# EAGLE board candle8x11n (EAGLE 6.6.0), part 1 of 4
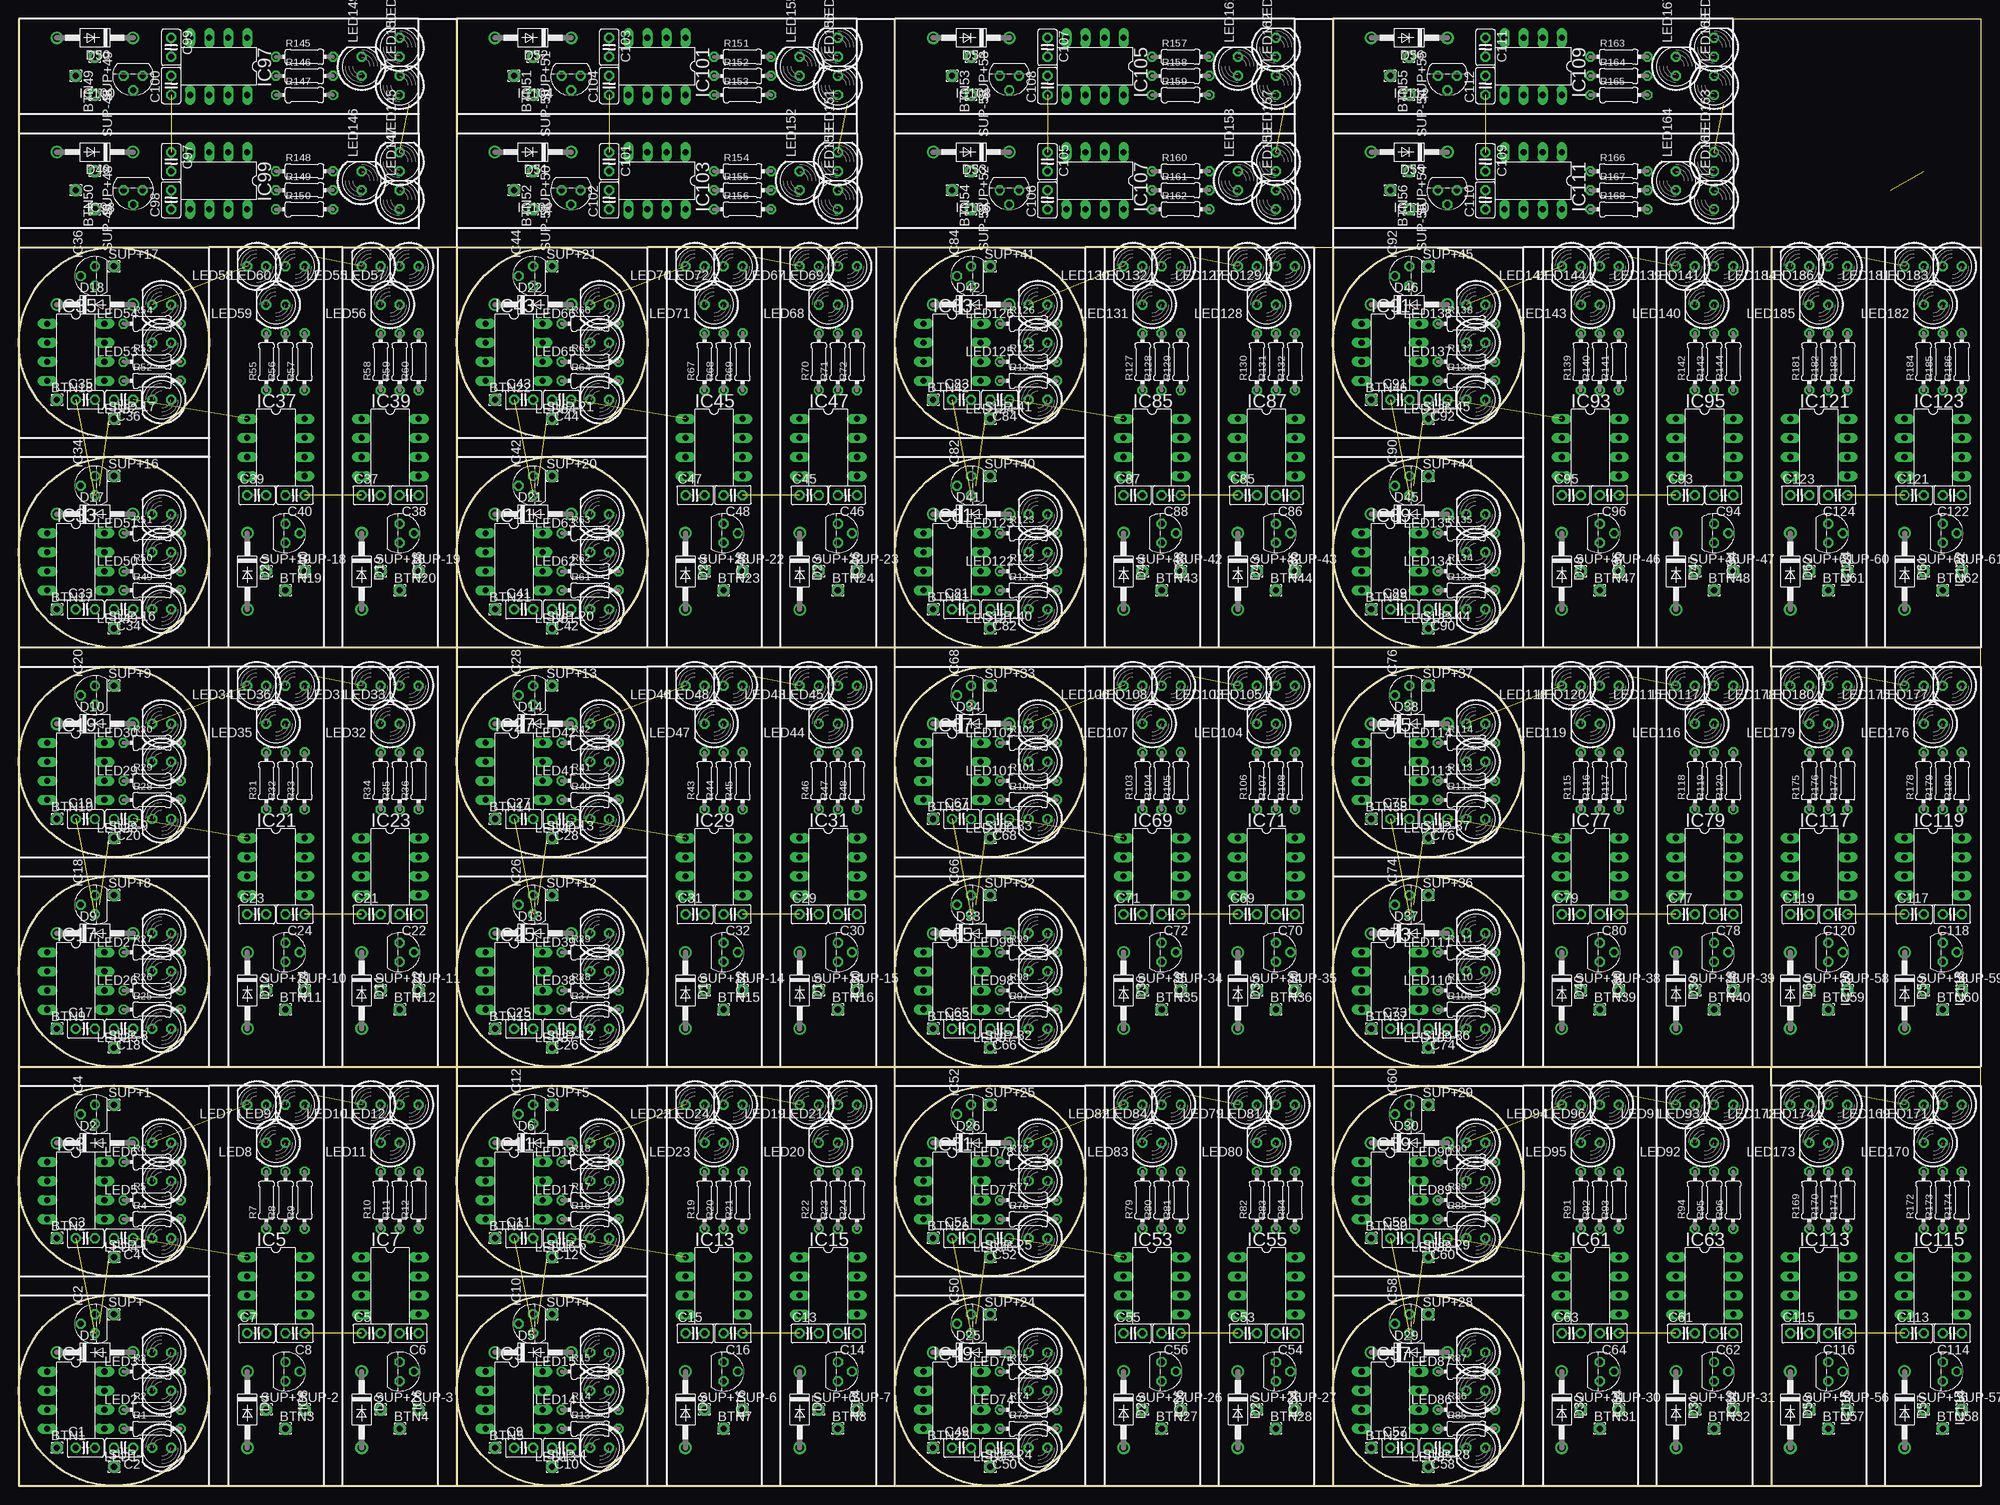
[diagram p0: board, top side]
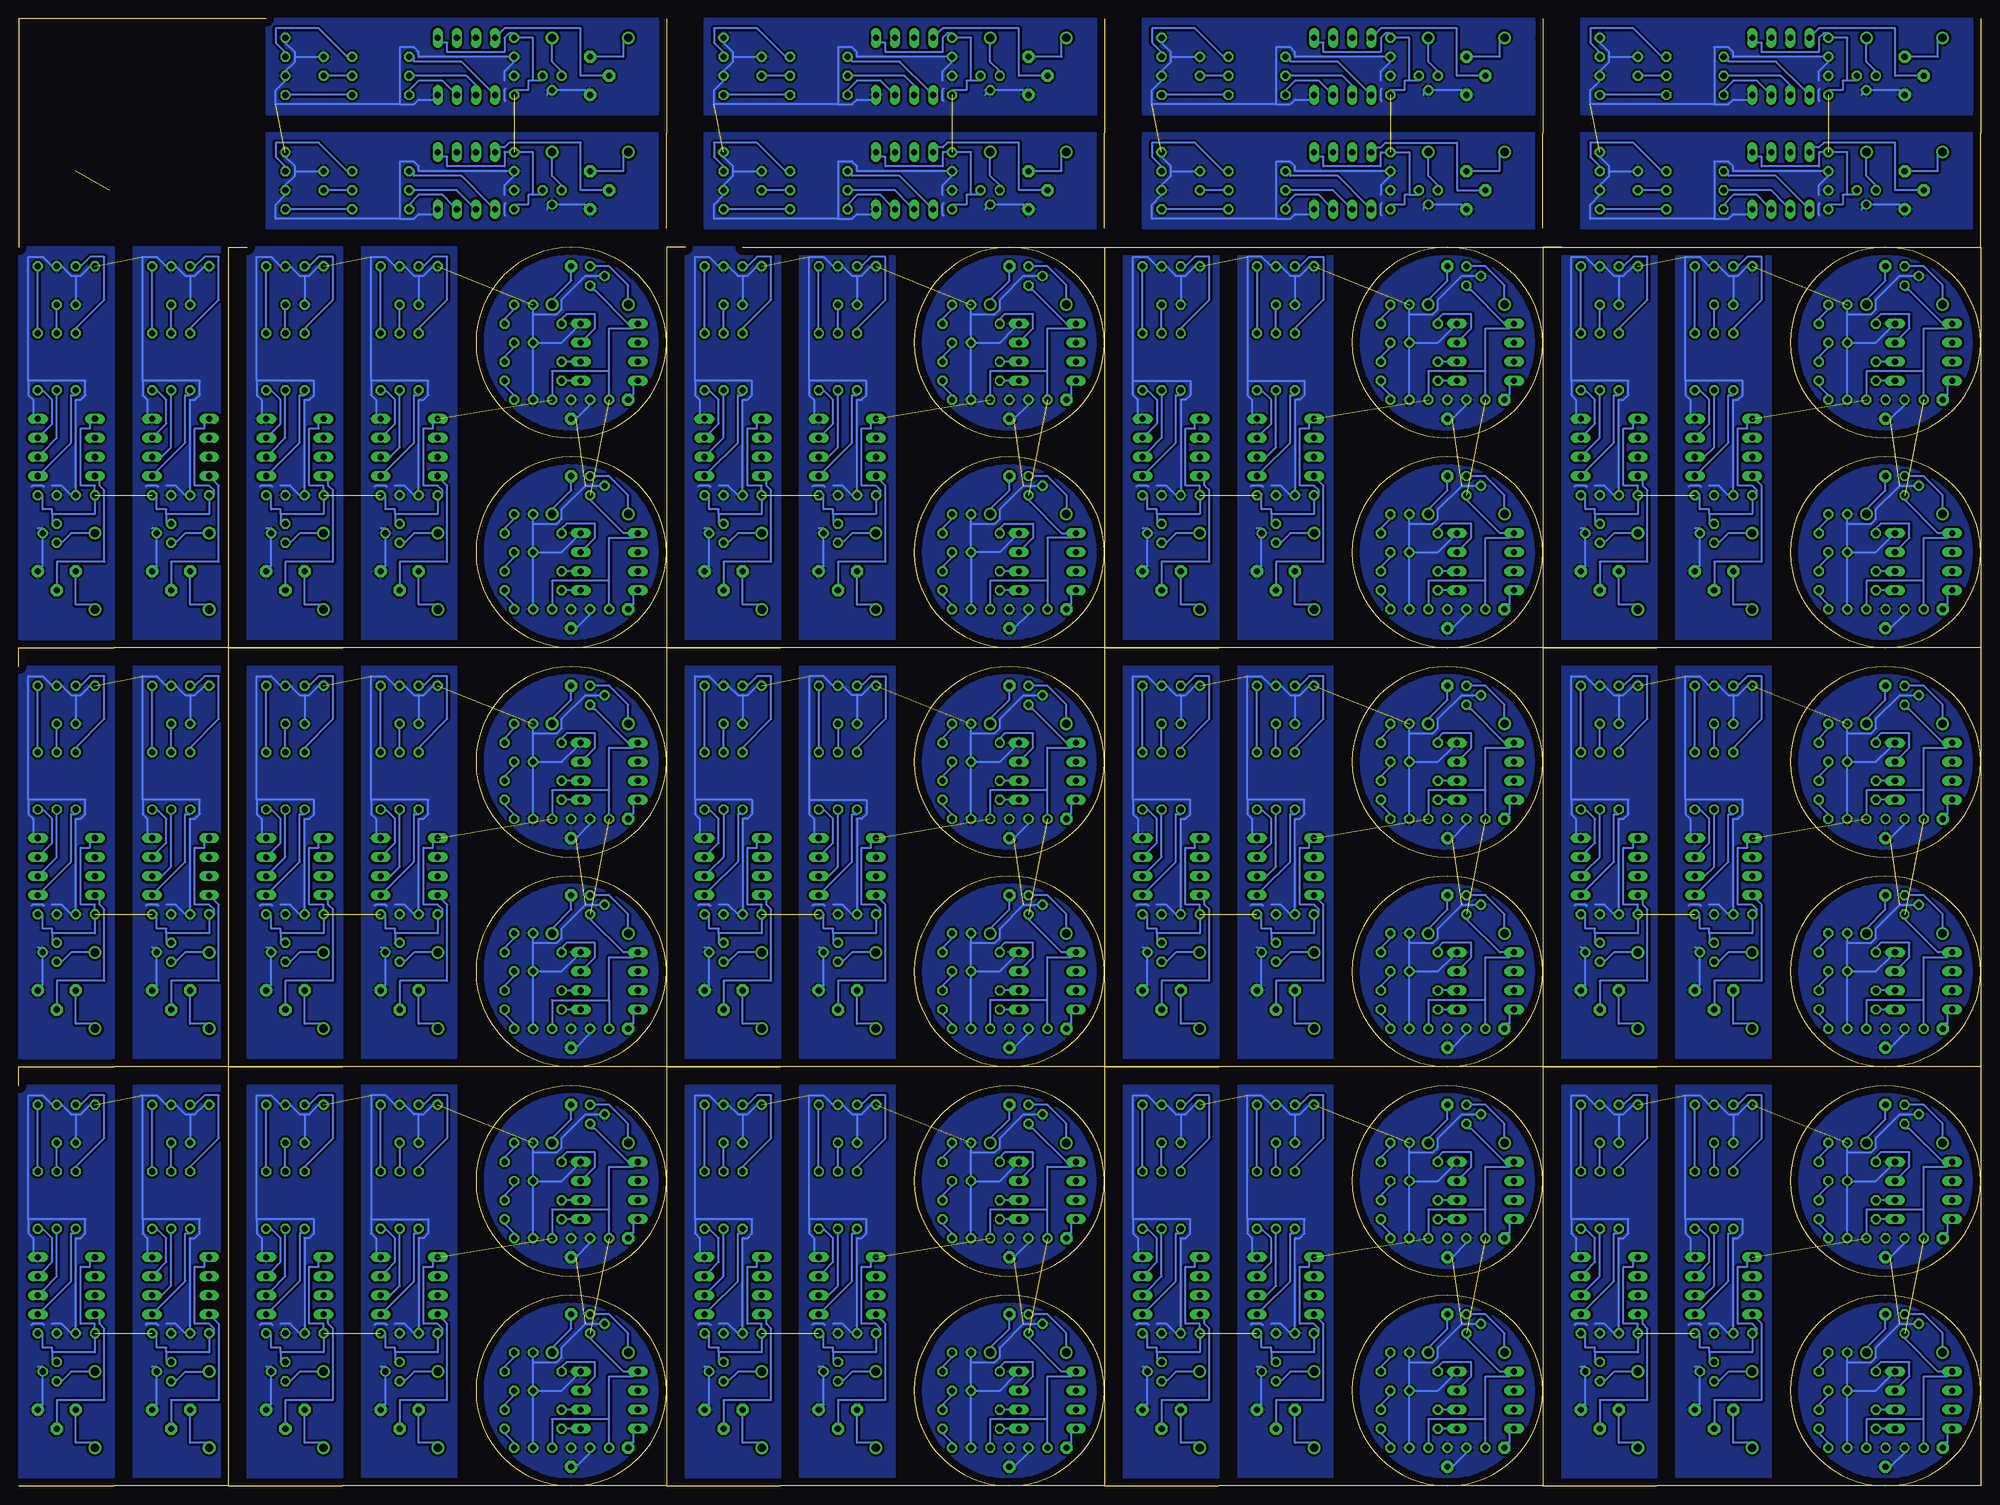
[diagram p1: board, bottom side, seen from below]

Size 261.62 x 195.58 mm. Coordinates in mm from the lower left corner, seen from the top.
Outline: 257 segments
Copper layers (1*16): Top 0.035mm / dielectric 1.5mm / Bottom 0.035mm
Design rules "custompcb": minimum track width 10mil, minimum drill 24mil, track to track 12mil, track to pad 12mil, pad to pad 12mil, via to via 12mil, smd to smd 12mil, copper to edge 40mil, drill to drill 12mil, minimum pad ring 10mil, minimum via ring 8mil, stop-mask expansion 0mil, vias tented up to drill 0mil, thermal gap 10mil

## Footprints (pad centres in the part's own frame; a part is rotated, then mirrored left to right if it is on the bottom)
1,6/0,8 = drill 0.813 pad 1.6 octagon: 1 0,0
C025-025X050 = drill 0.813 octagon: 1 -1.27,0; 2 1.27,0
DO41-10 = drill 1.118: A 5.08,0; C -5.08,0
DIL8 = drill 0.813 long: 1 -3.81,-3.81; 2 -1.27,-3.81; 3 1.27,-3.81; 4 3.81,-3.81; 5 3.81,3.81; 6 1.27,3.81; 7 -1.27,3.81; 8 -3.81,3.81
TO92 = drill 0.813 octagon: 1 -1.27,0; 2 0,1.905; 3 1.27,0
LED5MM = drill 0.813 octagon: A -1.27,0; K 1.27,0
0204/7 = drill 0.813 octagon: 1 -3.81,0; 2 3.81,0

## Placement (x,y rotation side)
BTN1  [1,6/0,8]  5.08,5.08 0 top
BTN2  [1,6/0,8]  5.08,33.02 0 top
BTN3  [1,6/0,8]  35.56,7.62 0 top
BTN4  [1,6/0,8]  50.8,7.62 0 top
BTN5  [1,6/0,8]  63.5,5.08 0 top
BTN6  [1,6/0,8]  63.5,33.02 0 top
BTN7  [1,6/0,8]  93.98,7.62 0 top
BTN8  [1,6/0,8]  109.22,7.62 0 top
BTN9  [1,6/0,8]  5.08,60.96 0 top
BTN10  [1,6/0,8]  5.08,88.9 0 top
BTN11  [1,6/0,8]  35.56,63.5 0 top
BTN12  [1,6/0,8]  50.8,63.5 0 top
BTN13  [1,6/0,8]  63.5,60.96 0 top
BTN14  [1,6/0,8]  63.5,88.9 0 top
BTN15  [1,6/0,8]  93.98,63.5 0 top
BTN16  [1,6/0,8]  109.22,63.5 0 top
BTN17  [1,6/0,8]  5.08,116.84 0 top
BTN18  [1,6/0,8]  5.08,144.78 0 top
BTN19  [1,6/0,8]  35.56,119.38 0 top
BTN20  [1,6/0,8]  50.8,119.38 0 top
BTN21  [1,6/0,8]  63.5,116.84 0 top
BTN22  [1,6/0,8]  63.5,144.78 0 top
BTN23  [1,6/0,8]  93.98,119.38 0 top
BTN24  [1,6/0,8]  109.22,119.38 0 top
BTN25  [1,6/0,8]  121.92,5.08 0 top
BTN26  [1,6/0,8]  121.92,33.02 0 top
BTN27  [1,6/0,8]  152.4,7.62 0 top
BTN28  [1,6/0,8]  167.64,7.62 0 top
BTN29  [1,6/0,8]  180.34,5.08 0 top
BTN30  [1,6/0,8]  180.34,33.02 0 top
BTN31  [1,6/0,8]  210.82,7.62 0 top
BTN32  [1,6/0,8]  226.06,7.62 0 top
BTN33  [1,6/0,8]  121.92,60.96 0 top
BTN34  [1,6/0,8]  121.92,88.9 0 top
BTN35  [1,6/0,8]  152.4,63.5 0 top
BTN36  [1,6/0,8]  167.64,63.5 0 top
BTN37  [1,6/0,8]  180.34,60.96 0 top
BTN38  [1,6/0,8]  180.34,88.9 0 top
BTN39  [1,6/0,8]  210.82,63.5 0 top
BTN40  [1,6/0,8]  226.06,63.5 0 top
BTN41  [1,6/0,8]  121.92,116.84 0 top
BTN42  [1,6/0,8]  121.92,144.78 0 top
BTN43  [1,6/0,8]  152.4,119.38 0 top
BTN44  [1,6/0,8]  167.64,119.38 0 top
BTN45  [1,6/0,8]  180.34,116.84 0 top
BTN46  [1,6/0,8]  180.34,144.78 0 top
BTN47  [1,6/0,8]  210.82,119.38 0 top
BTN48  [1,6/0,8]  226.06,119.38 0 top
BTN49  [1,6/0,8]  7.62,187.96 270 top
BTN50  [1,6/0,8]  7.62,172.72 270 top
BTN51  [1,6/0,8]  66.04,187.96 270 top
BTN52  [1,6/0,8]  66.04,172.72 270 top
BTN53  [1,6/0,8]  124.46,187.96 270 top
BTN54  [1,6/0,8]  124.46,172.72 270 top
BTN55  [1,6/0,8]  182.88,187.96 270 top
BTN56  [1,6/0,8]  182.88,172.72 270 top
BTN57  [1,6/0,8]  241.3,7.62 0 top
BTN58  [1,6/0,8]  256.54,7.62 0 top
BTN59  [1,6/0,8]  241.3,63.5 0 top
BTN60  [1,6/0,8]  256.54,63.5 0 top
BTN61  [1,6/0,8]  241.3,119.38 0 top
BTN62  [1,6/0,8]  256.54,119.38 0 top
C1  [C025-025X050]  8.89,5.08 0 top
C2  [C025-025X050]  13.97,5.08 180 top
C3  [C025-025X050]  8.89,33.02 0 top
C4  [C025-025X050]  13.97,33.02 180 top
C5  [C025-025X050]  46.99,20.32 0 top
C6  [C025-025X050]  52.07,20.32 180 top
C7  [C025-025X050]  31.75,20.32 0 top
C8  [C025-025X050]  36.83,20.32 180 top
C9  [C025-025X050]  67.31,5.08 0 top
C10  [C025-025X050]  72.39,5.08 180 top
C11  [C025-025X050]  67.31,33.02 0 top
C12  [C025-025X050]  72.39,33.02 180 top
C13  [C025-025X050]  105.41,20.32 0 top
C14  [C025-025X050]  110.49,20.32 180 top
C15  [C025-025X050]  90.17,20.32 0 top
C16  [C025-025X050]  95.25,20.32 180 top
C17  [C025-025X050]  8.89,60.96 0 top
C18  [C025-025X050]  13.97,60.96 180 top
C19  [C025-025X050]  8.89,88.9 0 top
C20  [C025-025X050]  13.97,88.9 180 top
C21  [C025-025X050]  46.99,76.2 0 top
C22  [C025-025X050]  52.07,76.2 180 top
C23  [C025-025X050]  31.75,76.2 0 top
C24  [C025-025X050]  36.83,76.2 180 top
C25  [C025-025X050]  67.31,60.96 0 top
C26  [C025-025X050]  72.39,60.96 180 top
C27  [C025-025X050]  67.31,88.9 0 top
C28  [C025-025X050]  72.39,88.9 180 top
C29  [C025-025X050]  105.41,76.2 0 top
C30  [C025-025X050]  110.49,76.2 180 top
C31  [C025-025X050]  90.17,76.2 0 top
C32  [C025-025X050]  95.25,76.2 180 top
C33  [C025-025X050]  8.89,116.84 0 top
C34  [C025-025X050]  13.97,116.84 180 top
C35  [C025-025X050]  8.89,144.78 0 top
C36  [C025-025X050]  13.97,144.78 180 top
C37  [C025-025X050]  46.99,132.08 0 top
C38  [C025-025X050]  52.07,132.08 180 top
C39  [C025-025X050]  31.75,132.08 0 top
C40  [C025-025X050]  36.83,132.08 180 top
C41  [C025-025X050]  67.31,116.84 0 top
C42  [C025-025X050]  72.39,116.84 180 top
C43  [C025-025X050]  67.31,144.78 0 top
C44  [C025-025X050]  72.39,144.78 180 top
C45  [C025-025X050]  105.41,132.08 0 top
C46  [C025-025X050]  110.49,132.08 180 top
C47  [C025-025X050]  90.17,132.08 0 top
C48  [C025-025X050]  95.25,132.08 180 top
C49  [C025-025X050]  125.73,5.08 0 top
C50  [C025-025X050]  130.81,5.08 180 top
C51  [C025-025X050]  125.73,33.02 0 top
C52  [C025-025X050]  130.81,33.02 180 top
C53  [C025-025X050]  163.83,20.32 0 top
C54  [C025-025X050]  168.91,20.32 180 top
C55  [C025-025X050]  148.59,20.32 0 top
C56  [C025-025X050]  153.67,20.32 180 top
C57  [C025-025X050]  184.15,5.08 0 top
C58  [C025-025X050]  189.23,5.08 180 top
C59  [C025-025X050]  184.15,33.02 0 top
C60  [C025-025X050]  189.23,33.02 180 top
C61  [C025-025X050]  222.25,20.32 0 top
C62  [C025-025X050]  227.33,20.32 180 top
C63  [C025-025X050]  207.01,20.32 0 top
C64  [C025-025X050]  212.09,20.32 180 top
C65  [C025-025X050]  125.73,60.96 0 top
C66  [C025-025X050]  130.81,60.96 180 top
C67  [C025-025X050]  125.73,88.9 0 top
C68  [C025-025X050]  130.81,88.9 180 top
C69  [C025-025X050]  163.83,76.2 0 top
C70  [C025-025X050]  168.91,76.2 180 top
C71  [C025-025X050]  148.59,76.2 0 top
C72  [C025-025X050]  153.67,76.2 180 top
C73  [C025-025X050]  184.15,60.96 0 top
C74  [C025-025X050]  189.23,60.96 180 top
C75  [C025-025X050]  184.15,88.9 0 top
C76  [C025-025X050]  189.23,88.9 180 top
C77  [C025-025X050]  222.25,76.2 0 top
C78  [C025-025X050]  227.33,76.2 180 top
C79  [C025-025X050]  207.01,76.2 0 top
C80  [C025-025X050]  212.09,76.2 180 top
C81  [C025-025X050]  125.73,116.84 0 top
C82  [C025-025X050]  130.81,116.84 180 top
C83  [C025-025X050]  125.73,144.78 0 top
C84  [C025-025X050]  130.81,144.78 180 top
C85  [C025-025X050]  163.83,132.08 0 top
C86  [C025-025X050]  168.91,132.08 180 top
C87  [C025-025X050]  148.59,132.08 0 top
C88  [C025-025X050]  153.67,132.08 180 top
C89  [C025-025X050]  184.15,116.84 0 top
C90  [C025-025X050]  189.23,116.84 180 top
C91  [C025-025X050]  184.15,144.78 0 top
C92  [C025-025X050]  189.23,144.78 180 top
C93  [C025-025X050]  222.25,132.08 0 top
C94  [C025-025X050]  227.33,132.08 180 top
C95  [C025-025X050]  207.01,132.08 0 top
C96  [C025-025X050]  212.09,132.08 180 top
C97  [C025-025X050]  20.32,176.53 270 top
C98  [C025-025X050]  20.32,171.45 90 top
C99  [C025-025X050]  20.32,191.77 270 top
C100  [C025-025X050]  20.32,186.69 90 top
C101  [C025-025X050]  78.74,176.53 270 top
C102  [C025-025X050]  78.74,171.45 90 top
C103  [C025-025X050]  78.74,191.77 270 top
C104  [C025-025X050]  78.74,186.69 90 top
C105  [C025-025X050]  137.16,176.53 270 top
C106  [C025-025X050]  137.16,171.45 90 top
C107  [C025-025X050]  137.16,191.77 270 top
C108  [C025-025X050]  137.16,186.69 90 top
C109  [C025-025X050]  195.58,176.53 270 top
C110  [C025-025X050]  195.58,171.45 90 top
C111  [C025-025X050]  195.58,191.77 270 top
C112  [C025-025X050]  195.58,186.69 90 top
C113  [C025-025X050]  252.73,20.32 0 top
C114  [C025-025X050]  257.81,20.32 180 top
C115  [C025-025X050]  237.49,20.32 0 top
C116  [C025-025X050]  242.57,20.32 180 top
C117  [C025-025X050]  252.73,76.2 0 top
C118  [C025-025X050]  257.81,76.2 180 top
C119  [C025-025X050]  237.49,76.2 0 top
C120  [C025-025X050]  242.57,76.2 180 top
C121  [C025-025X050]  252.73,132.08 0 top
C122  [C025-025X050]  257.81,132.08 180 top
C123  [C025-025X050]  237.49,132.08 0 top
C124  [C025-025X050]  242.57,132.08 180 top
D1  1N4004  [DO41-10]  10.16,17.78 0 top
D2  1N4004  [DO41-10]  10.16,45.72 0 top
D3  1N4004  [DO41-10]  45.72,10.16 270 top
D4  1N4004  [DO41-10]  30.48,10.16 270 top
D5  1N4004  [DO41-10]  68.58,17.78 0 top
D6  1N4004  [DO41-10]  68.58,45.72 0 top
D7  1N4004  [DO41-10]  104.14,10.16 270 top
D8  1N4004  [DO41-10]  88.9,10.16 270 top
D9  1N4004  [DO41-10]  10.16,73.66 0 top
D10  1N4004  [DO41-10]  10.16,101.6 0 top
D11  1N4004  [DO41-10]  45.72,66.04 270 top
D12  1N4004  [DO41-10]  30.48,66.04 270 top
D13  1N4004  [DO41-10]  68.58,73.66 0 top
D14  1N4004  [DO41-10]  68.58,101.6 0 top
D15  1N4004  [DO41-10]  104.14,66.04 270 top
D16  1N4004  [DO41-10]  88.9,66.04 270 top
D17  1N4004  [DO41-10]  10.16,129.54 0 top
D18  1N4004  [DO41-10]  10.16,157.48 0 top
D19  1N4004  [DO41-10]  45.72,121.92 270 top
D20  1N4004  [DO41-10]  30.48,121.92 270 top
D21  1N4004  [DO41-10]  68.58,129.54 0 top
D22  1N4004  [DO41-10]  68.58,157.48 0 top
D23  1N4004  [DO41-10]  104.14,121.92 270 top
D24  1N4004  [DO41-10]  88.9,121.92 270 top
D25  1N4004  [DO41-10]  127,17.78 0 top
D26  1N4004  [DO41-10]  127,45.72 0 top
D27  1N4004  [DO41-10]  162.56,10.16 270 top
D28  1N4004  [DO41-10]  147.32,10.16 270 top
D29  1N4004  [DO41-10]  185.42,17.78 0 top
D30  1N4004  [DO41-10]  185.42,45.72 0 top
D31  1N4004  [DO41-10]  220.98,10.16 270 top
D32  1N4004  [DO41-10]  205.74,10.16 270 top
D33  1N4004  [DO41-10]  127,73.66 0 top
D34  1N4004  [DO41-10]  127,101.6 0 top
D35  1N4004  [DO41-10]  162.56,66.04 270 top
D36  1N4004  [DO41-10]  147.32,66.04 270 top
D37  1N4004  [DO41-10]  185.42,73.66 0 top
D38  1N4004  [DO41-10]  185.42,101.6 0 top
D39  1N4004  [DO41-10]  220.98,66.04 270 top
D40  1N4004  [DO41-10]  205.74,66.04 270 top
D41  1N4004  [DO41-10]  127,129.54 0 top
D42  1N4004  [DO41-10]  127,157.48 0 top
D43  1N4004  [DO41-10]  162.56,121.92 270 top
D44  1N4004  [DO41-10]  147.32,121.92 270 top
D45  1N4004  [DO41-10]  185.42,129.54 0 top
D46  1N4004  [DO41-10]  185.42,157.48 0 top
D47  1N4004  [DO41-10]  220.98,121.92 270 top
D48  1N4004  [DO41-10]  205.74,121.92 270 top
D49  1N4004  [DO41-10]  10.16,177.8 180 top
D50  1N4004  [DO41-10]  10.16,193.04 180 top
D51  1N4004  [DO41-10]  68.58,177.8 180 top
D52  1N4004  [DO41-10]  68.58,193.04 180 top
D53  1N4004  [DO41-10]  127,177.8 180 top
D54  1N4004  [DO41-10]  127,193.04 180 top
D55  1N4004  [DO41-10]  185.42,177.8 180 top
D56  1N4004  [DO41-10]  185.42,193.04 180 top
D57  1N4004  [DO41-10]  251.46,10.16 270 top
D58  1N4004  [DO41-10]  236.22,10.16 270 top
D59  1N4004  [DO41-10]  251.46,66.04 270 top
D60  1N4004  [DO41-10]  236.22,66.04 270 top
D61  1N4004  [DO41-10]  251.46,121.92 270 top
D62  1N4004  [DO41-10]  236.22,121.92 270 top
IC1  PIC12F629P  [DIL8]  7.62,11.43 270 top
IC2  7805L  [TO92]  10.16,21.59 90 top
IC3  PIC12F629P  [DIL8]  7.62,39.37 270 top
IC4  7805L  [TO92]  10.16,49.53 90 top
IC5  PIC12F629P  [DIL8]  34.29,26.67 270 top
IC6  7805L  [TO92]  50.8,15.24 270 top
IC7  PIC12F629P  [DIL8]  49.53,26.67 270 top
IC8  7805L  [TO92]  35.56,15.24 270 top
IC9  PIC12F629P  [DIL8]  66.04,11.43 270 top
IC10  7805L  [TO92]  68.58,21.59 90 top
IC11  PIC12F629P  [DIL8]  66.04,39.37 270 top
IC12  7805L  [TO92]  68.58,49.53 90 top
IC13  PIC12F629P  [DIL8]  92.71,26.67 270 top
IC14  7805L  [TO92]  109.22,15.24 270 top
IC15  PIC12F629P  [DIL8]  107.95,26.67 270 top
IC16  7805L  [TO92]  93.98,15.24 270 top
IC17  PIC12F629P  [DIL8]  7.62,67.31 270 top
IC18  7805L  [TO92]  10.16,77.47 90 top
IC19  PIC12F629P  [DIL8]  7.62,95.25 270 top
IC20  7805L  [TO92]  10.16,105.41 90 top
IC21  PIC12F629P  [DIL8]  34.29,82.55 270 top
IC22  7805L  [TO92]  50.8,71.12 270 top
IC23  PIC12F629P  [DIL8]  49.53,82.55 270 top
IC24  7805L  [TO92]  35.56,71.12 270 top
IC25  PIC12F629P  [DIL8]  66.04,67.31 270 top
IC26  7805L  [TO92]  68.58,77.47 90 top
IC27  PIC12F629P  [DIL8]  66.04,95.25 270 top
IC28  7805L  [TO92]  68.58,105.41 90 top
IC29  PIC12F629P  [DIL8]  92.71,82.55 270 top
IC30  7805L  [TO92]  109.22,71.12 270 top
IC31  PIC12F629P  [DIL8]  107.95,82.55 270 top
IC32  7805L  [TO92]  93.98,71.12 270 top
IC33  PIC12F629P  [DIL8]  7.62,123.19 270 top
IC34  7805L  [TO92]  10.16,133.35 90 top
IC35  PIC12F629P  [DIL8]  7.62,151.13 270 top
IC36  7805L  [TO92]  10.16,161.29 90 top
IC37  PIC12F629P  [DIL8]  34.29,138.43 270 top
IC38  7805L  [TO92]  50.8,127 270 top
IC39  PIC12F629P  [DIL8]  49.53,138.43 270 top
IC40  7805L  [TO92]  35.56,127 270 top
IC41  PIC12F629P  [DIL8]  66.04,123.19 270 top
IC42  7805L  [TO92]  68.58,133.35 90 top
IC43  PIC12F629P  [DIL8]  66.04,151.13 270 top
IC44  7805L  [TO92]  68.58,161.29 90 top
IC45  PIC12F629P  [DIL8]  92.71,138.43 270 top
IC46  7805L  [TO92]  109.22,127 270 top
IC47  PIC12F629P  [DIL8]  107.95,138.43 270 top
IC48  7805L  [TO92]  93.98,127 270 top
IC49  PIC12F629P  [DIL8]  124.46,11.43 270 top
IC50  7805L  [TO92]  127,21.59 90 top
IC51  PIC12F629P  [DIL8]  124.46,39.37 270 top
IC52  7805L  [TO92]  127,49.53 90 top
IC53  PIC12F629P  [DIL8]  151.13,26.67 270 top
IC54  7805L  [TO92]  167.64,15.24 270 top
IC55  PIC12F629P  [DIL8]  166.37,26.67 270 top
IC56  7805L  [TO92]  152.4,15.24 270 top
IC57  PIC12F629P  [DIL8]  182.88,11.43 270 top
IC58  7805L  [TO92]  185.42,21.59 90 top
IC59  PIC12F629P  [DIL8]  182.88,39.37 270 top
IC60  7805L  [TO92]  185.42,49.53 90 top
IC61  PIC12F629P  [DIL8]  209.55,26.67 270 top
IC62  7805L  [TO92]  226.06,15.24 270 top
IC63  PIC12F629P  [DIL8]  224.79,26.67 270 top
IC64  7805L  [TO92]  210.82,15.24 270 top
IC65  PIC12F629P  [DIL8]  124.46,67.31 270 top
IC66  7805L  [TO92]  127,77.47 90 top
IC67  PIC12F629P  [DIL8]  124.46,95.25 270 top
IC68  7805L  [TO92]  127,105.41 90 top
IC69  PIC12F629P  [DIL8]  151.13,82.55 270 top
IC70  7805L  [TO92]  167.64,71.12 270 top
IC71  PIC12F629P  [DIL8]  166.37,82.55 270 top
IC72  7805L  [TO92]  152.4,71.12 270 top
IC73  PIC12F629P  [DIL8]  182.88,67.31 270 top
IC74  7805L  [TO92]  185.42,77.47 90 top
IC75  PIC12F629P  [DIL8]  182.88,95.25 270 top
IC76  7805L  [TO92]  185.42,105.41 90 top
IC77  PIC12F629P  [DIL8]  209.55,82.55 270 top
IC78  7805L  [TO92]  226.06,71.12 270 top
IC79  PIC12F629P  [DIL8]  224.79,82.55 270 top
IC80  7805L  [TO92]  210.82,71.12 270 top
IC81  PIC12F629P  [DIL8]  124.46,123.19 270 top
IC82  7805L  [TO92]  127,133.35 90 top
IC83  PIC12F629P  [DIL8]  124.46,151.13 270 top
IC84  7805L  [TO92]  127,161.29 90 top
IC85  PIC12F629P  [DIL8]  151.13,138.43 270 top
IC86  7805L  [TO92]  167.64,127 270 top
IC87  PIC12F629P  [DIL8]  166.37,138.43 270 top
IC88  7805L  [TO92]  152.4,127 270 top
IC89  PIC12F629P  [DIL8]  182.88,123.19 270 top
IC90  7805L  [TO92]  185.42,133.35 90 top
IC91  PIC12F629P  [DIL8]  182.88,151.13 270 top
IC92  7805L  [TO92]  185.42,161.29 90 top
IC93  PIC12F629P  [DIL8]  209.55,138.43 270 top
IC94  7805L  [TO92]  226.06,127 270 top
IC95  PIC12F629P  [DIL8]  224.79,138.43 270 top
IC96  7805L  [TO92]  210.82,127 270 top
IC97  PIC12F629P  [DIL8]  26.67,189.23 180 top
IC98  7805L  [TO92]  15.24,172.72 180 top
IC99  PIC12F629P  [DIL8]  26.67,173.99 180 top
IC100  7805L  [TO92]  15.24,187.96 180 top
IC101  PIC12F629P  [DIL8]  85.09,189.23 180 top
IC102  7805L  [TO92]  73.66,172.72 180 top
IC103  PIC12F629P  [DIL8]  85.09,173.99 180 top
IC104  7805L  [TO92]  73.66,187.96 180 top
IC105  PIC12F629P  [DIL8]  143.51,189.23 180 top
IC106  7805L  [TO92]  132.08,172.72 180 top
IC107  PIC12F629P  [DIL8]  143.51,173.99 180 top
IC108  7805L  [TO92]  132.08,187.96 180 top
IC109  PIC12F629P  [DIL8]  201.93,189.23 180 top
IC110  7805L  [TO92]  190.5,172.72 180 top
IC111  PIC12F629P  [DIL8]  201.93,173.99 180 top
IC112  7805L  [TO92]  190.5,187.96 180 top
IC113  PIC12F629P  [DIL8]  240.03,26.67 270 top
IC114  7805L  [TO92]  256.54,15.24 270 top
IC115  PIC12F629P  [DIL8]  255.27,26.67 270 top
IC116  7805L  [TO92]  241.3,15.24 270 top
IC117  PIC12F629P  [DIL8]  240.03,82.55 270 top
IC118  7805L  [TO92]  256.54,71.12 270 top
IC119  PIC12F629P  [DIL8]  255.27,82.55 270 top
IC120  7805L  [TO92]  241.3,71.12 270 top
IC121  PIC12F629P  [DIL8]  240.03,138.43 270 top
IC122  7805L  [TO92]  256.54,127 270 top
IC123  PIC12F629P  [DIL8]  255.27,138.43 270 top
IC124  7805L  [TO92]  241.3,127 270 top
LED1  [LED5MM]  19.05,5.08 180 top
LED2  [LED5MM]  19.05,12.7 180 top
LED3  [LED5MM]  19.05,17.78 180 top
LED4  [LED5MM]  19.05,33.02 180 top
LED5  [LED5MM]  19.05,40.64 180 top
LED6  [LED5MM]  19.05,45.72 180 top
LED7  [LED5MM]  31.75,50.8 180 top
LED8  [LED5MM]  34.29,45.72 180 top
LED9  [LED5MM]  36.83,50.8 180 top
LED10  [LED5MM]  46.99,50.8 180 top
LED11  [LED5MM]  49.53,45.72 180 top
LED12  [LED5MM]  52.07,50.8 180 top
LED13  [LED5MM]  77.47,5.08 180 top
LED14  [LED5MM]  77.47,12.7 180 top
LED15  [LED5MM]  77.47,17.78 180 top
LED16  [LED5MM]  77.47,33.02 180 top
LED17  [LED5MM]  77.47,40.64 180 top
LED18  [LED5MM]  77.47,45.72 180 top
LED19  [LED5MM]  105.41,50.8 180 top
LED20  [LED5MM]  107.95,45.72 180 top
LED21  [LED5MM]  110.49,50.8 180 top
LED22  [LED5MM]  90.17,50.8 180 top
LED23  [LED5MM]  92.71,45.72 180 top
LED24  [LED5MM]  95.25,50.8 180 top
LED25  [LED5MM]  19.05,60.96 180 top
LED26  [LED5MM]  19.05,68.58 180 top
LED27  [LED5MM]  19.05,73.66 180 top
LED28  [LED5MM]  19.05,88.9 180 top
LED29  [LED5MM]  19.05,96.52 180 top
LED30  [LED5MM]  19.05,101.6 180 top
LED31  [LED5MM]  46.99,106.68 180 top
LED32  [LED5MM]  49.53,101.6 180 top
LED33  [LED5MM]  52.07,106.68 180 top
LED34  [LED5MM]  31.75,106.68 180 top
LED35  [LED5MM]  34.29,101.6 180 top
LED36  [LED5MM]  36.83,106.68 180 top
LED37  [LED5MM]  77.47,60.96 180 top
LED38  [LED5MM]  77.47,68.58 180 top
LED39  [LED5MM]  77.47,73.66 180 top
LED40  [LED5MM]  77.47,88.9 180 top
LED41  [LED5MM]  77.47,96.52 180 top
LED42  [LED5MM]  77.47,101.6 180 top
LED43  [LED5MM]  105.41,106.68 180 top
LED44  [LED5MM]  107.95,101.6 180 top
LED45  [LED5MM]  110.49,106.68 180 top
LED46  [LED5MM]  90.17,106.68 180 top
LED47  [LED5MM]  92.71,101.6 180 top
LED48  [LED5MM]  95.25,106.68 180 top
LED49  [LED5MM]  19.05,116.84 180 top
LED50  [LED5MM]  19.05,124.46 180 top
LED51  [LED5MM]  19.05,129.54 180 top
LED52  [LED5MM]  19.05,144.78 180 top
LED53  [LED5MM]  19.05,152.4 180 top
LED54  [LED5MM]  19.05,157.48 180 top
LED55  [LED5MM]  46.99,162.56 180 top
LED56  [LED5MM]  49.53,157.48 180 top
LED57  [LED5MM]  52.07,162.56 180 top
LED58  [LED5MM]  31.75,162.56 180 top
LED59  [LED5MM]  34.29,157.48 180 top
LED60  [LED5MM]  36.83,162.56 180 top
LED61  [LED5MM]  77.47,116.84 180 top
LED62  [LED5MM]  77.47,124.46 180 top
LED63  [LED5MM]  77.47,129.54 180 top
LED64  [LED5MM]  77.47,144.78 180 top
LED65  [LED5MM]  77.47,152.4 180 top
LED66  [LED5MM]  77.47,157.48 180 top
LED67  [LED5MM]  105.41,162.56 180 top
LED68  [LED5MM]  107.95,157.48 180 top
LED69  [LED5MM]  110.49,162.56 180 top
LED70  [LED5MM]  90.17,162.56 180 top
LED71  [LED5MM]  92.71,157.48 180 top
LED72  [LED5MM]  95.25,162.56 180 top
LED73  [LED5MM]  135.89,5.08 180 top
LED74  [LED5MM]  135.89,12.7 180 top
LED75  [LED5MM]  135.89,17.78 180 top
LED76  [LED5MM]  135.89,33.02 180 top
LED77  [LED5MM]  135.89,40.64 180 top
LED78  [LED5MM]  135.89,45.72 180 top
LED79  [LED5MM]  163.83,50.8 180 top
LED80  [LED5MM]  166.37,45.72 180 top
LED81  [LED5MM]  168.91,50.8 180 top
LED82  [LED5MM]  148.59,50.8 180 top
LED83  [LED5MM]  151.13,45.72 180 top
LED84  [LED5MM]  153.67,50.8 180 top
LED85  [LED5MM]  194.31,5.08 180 top
LED86  [LED5MM]  194.31,12.7 180 top
LED87  [LED5MM]  194.31,17.78 180 top
LED88  [LED5MM]  194.31,33.02 180 top
LED89  [LED5MM]  194.31,40.64 180 top
LED90  [LED5MM]  194.31,45.72 180 top
LED91  [LED5MM]  222.25,50.8 180 top
LED92  [LED5MM]  224.79,45.72 180 top
LED93  [LED5MM]  227.33,50.8 180 top
LED94  [LED5MM]  207.01,50.8 180 top
LED95  [LED5MM]  209.55,45.72 180 top
LED96  [LED5MM]  212.09,50.8 180 top
LED97  [LED5MM]  135.89,60.96 180 top
LED98  [LED5MM]  135.89,68.58 180 top
LED99  [LED5MM]  135.89,73.66 180 top
LED100  [LED5MM]  135.89,88.9 180 top
LED101  [LED5MM]  135.89,96.52 180 top
LED102  [LED5MM]  135.89,101.6 180 top
LED103  [LED5MM]  163.83,106.68 180 top
LED104  [LED5MM]  166.37,101.6 180 top
LED105  [LED5MM]  168.91,106.68 180 top
LED106  [LED5MM]  148.59,106.68 180 top
LED107  [LED5MM]  151.13,101.6 180 top
LED108  [LED5MM]  153.67,106.68 180 top
LED109  [LED5MM]  194.31,60.96 180 top
LED110  [LED5MM]  194.31,68.58 180 top
LED111  [LED5MM]  194.31,73.66 180 top
LED112  [LED5MM]  194.31,88.9 180 top
LED113  [LED5MM]  194.31,96.52 180 top
LED114  [LED5MM]  194.31,101.6 180 top
LED115  [LED5MM]  222.25,106.68 180 top
LED116  [LED5MM]  224.79,101.6 180 top
LED117  [LED5MM]  227.33,106.68 180 top
LED118  [LED5MM]  207.01,106.68 180 top
LED119  [LED5MM]  209.55,101.6 180 top
LED120  [LED5MM]  212.09,106.68 180 top
LED121  [LED5MM]  135.89,116.84 180 top
LED122  [LED5MM]  135.89,124.46 180 top
LED123  [LED5MM]  135.89,129.54 180 top
LED124  [LED5MM]  135.89,144.78 180 top
LED125  [LED5MM]  135.89,152.4 180 top
LED126  [LED5MM]  135.89,157.48 180 top
LED127  [LED5MM]  163.83,162.56 180 top
LED128  [LED5MM]  166.37,157.48 180 top
LED129  [LED5MM]  168.91,162.56 180 top
LED130  [LED5MM]  148.59,162.56 180 top
LED131  [LED5MM]  151.13,157.48 180 top
LED132  [LED5MM]  153.67,162.56 180 top
LED133  [LED5MM]  194.31,116.84 180 top
LED134  [LED5MM]  194.31,124.46 180 top
LED135  [LED5MM]  194.31,129.54 180 top
LED136  [LED5MM]  194.31,144.78 180 top
LED137  [LED5MM]  194.31,152.4 180 top
LED138  [LED5MM]  194.31,157.48 180 top
LED139  [LED5MM]  222.25,162.56 180 top
LED140  [LED5MM]  224.79,157.48 180 top
LED141  [LED5MM]  227.33,162.56 180 top
LED142  [LED5MM]  207.01,162.56 180 top
LED143  [LED5MM]  209.55,157.48 180 top
LED144  [LED5MM]  212.09,162.56 180 top
LED145  [LED5MM]  50.8,176.53 90 top
LED146  [LED5MM]  45.72,173.99 90 top
LED147  [LED5MM]  50.8,171.45 90 top
LED148  [LED5MM]  50.8,191.77 90 top
LED149  [LED5MM]  45.72,189.23 90 top
LED150  [LED5MM]  50.8,186.69 90 top
LED151  [LED5MM]  109.22,176.53 90 top
LED152  [LED5MM]  104.14,173.99 90 top
LED153  [LED5MM]  109.22,171.45 90 top
LED154  [LED5MM]  109.22,191.77 90 top
LED155  [LED5MM]  104.14,189.23 90 top
LED156  [LED5MM]  109.22,186.69 90 top
LED157  [LED5MM]  167.64,176.53 90 top
LED158  [LED5MM]  162.56,173.99 90 top
LED159  [LED5MM]  167.64,171.45 90 top
LED160  [LED5MM]  167.64,191.77 90 top
LED161  [LED5MM]  162.56,189.23 90 top
LED162  [LED5MM]  167.64,186.69 90 top
LED163  [LED5MM]  226.06,176.53 90 top
LED164  [LED5MM]  220.98,173.99 90 top
LED165  [LED5MM]  226.06,171.45 90 top
LED166  [LED5MM]  226.06,191.77 90 top
LED167  [LED5MM]  220.98,189.23 90 top
LED168  [LED5MM]  226.06,186.69 90 top
LED169  [LED5MM]  252.73,50.8 180 top
LED170  [LED5MM]  255.27,45.72 180 top
LED171  [LED5MM]  257.81,50.8 180 top
LED172  [LED5MM]  237.49,50.8 180 top
LED173  [LED5MM]  240.03,45.72 180 top
LED174  [LED5MM]  242.57,50.8 180 top
LED175  [LED5MM]  252.73,106.68 180 top
LED176  [LED5MM]  255.27,101.6 180 top
LED177  [LED5MM]  257.81,106.68 180 top
LED178  [LED5MM]  237.49,106.68 180 top
LED179  [LED5MM]  240.03,101.6 180 top
LED180  [LED5MM]  242.57,106.68 180 top
LED181  [LED5MM]  252.73,162.56 180 top
LED182  [LED5MM]  255.27,157.48 180 top
LED183  [LED5MM]  257.81,162.56 180 top
LED184  [LED5MM]  237.49,162.56 180 top
LED185  [LED5MM]  240.03,157.48 180 top
LED186  [LED5MM]  242.57,162.56 180 top
R1  [0204/7]  17.78,7.62 0 top
R2  [0204/7]  17.78,10.16 0 top
R3  [0204/7]  17.78,15.24 0 top
R4  [0204/7]  17.78,35.56 0 top
R5  [0204/7]  17.78,38.1 0 top
R6  [0204/7]  17.78,43.18 0 top
R7  [0204/7]  33.02,38.1 90 top
R8  [0204/7]  35.56,38.1 90 top
R9  [0204/7]  38.1,38.1 90 top
R10  [0204/7]  48.26,38.1 90 top
R11  [0204/7]  50.8,38.1 90 top
R12  [0204/7]  53.34,38.1 90 top
R13  [0204/7]  76.2,7.62 0 top
R14  [0204/7]  76.2,10.16 0 top
R15  [0204/7]  76.2,15.24 0 top
R16  [0204/7]  76.2,35.56 0 top
R17  [0204/7]  76.2,38.1 0 top
R18  [0204/7]  76.2,43.18 0 top
R19  [0204/7]  91.44,38.1 90 top
R20  [0204/7]  93.98,38.1 90 top
R21  [0204/7]  96.52,38.1 90 top
R22  [0204/7]  106.68,38.1 90 top
R23  [0204/7]  109.22,38.1 90 top
R24  [0204/7]  111.76,38.1 90 top
R25  [0204/7]  17.78,63.5 0 top
R26  [0204/7]  17.78,66.04 0 top
R27  [0204/7]  17.78,71.12 0 top
R28  [0204/7]  17.78,91.44 0 top
R29  [0204/7]  17.78,93.98 0 top
R30  [0204/7]  17.78,99.06 0 top
R31  [0204/7]  33.02,93.98 90 top
R32  [0204/7]  35.56,93.98 90 top
R33  [0204/7]  38.1,93.98 90 top
R34  [0204/7]  48.26,93.98 90 top
R35  [0204/7]  50.8,93.98 90 top
R36  [0204/7]  53.34,93.98 90 top
R37  [0204/7]  76.2,63.5 0 top
R38  [0204/7]  76.2,66.04 0 top
R39  [0204/7]  76.2,71.12 0 top
R40  [0204/7]  76.2,91.44 0 top
R41  [0204/7]  76.2,93.98 0 top
R42  [0204/7]  76.2,99.06 0 top
R43  [0204/7]  91.44,93.98 90 top
R44  [0204/7]  93.98,93.98 90 top
R45  [0204/7]  96.52,93.98 90 top
R46  [0204/7]  106.68,93.98 90 top
R47  [0204/7]  109.22,93.98 90 top
R48  [0204/7]  111.76,93.98 90 top
R49  [0204/7]  17.78,119.38 0 top
R50  [0204/7]  17.78,121.92 0 top
R51  [0204/7]  17.78,127 0 top
R52  [0204/7]  17.78,147.32 0 top
R53  [0204/7]  17.78,149.86 0 top
R54  [0204/7]  17.78,154.94 0 top
R55  [0204/7]  33.02,149.86 90 top
R56  [0204/7]  35.56,149.86 90 top
R57  [0204/7]  38.1,149.86 90 top
R58  [0204/7]  48.26,149.86 90 top
R59  [0204/7]  50.8,149.86 90 top
R60  [0204/7]  53.34,149.86 90 top
R61  [0204/7]  76.2,119.38 0 top
R62  [0204/7]  76.2,121.92 0 top
R63  [0204/7]  76.2,127 0 top
R64  [0204/7]  76.2,147.32 0 top
R65  [0204/7]  76.2,149.86 0 top
R66  [0204/7]  76.2,154.94 0 top
R67  [0204/7]  91.44,149.86 90 top
R68  [0204/7]  93.98,149.86 90 top
R69  [0204/7]  96.52,149.86 90 top
R70  [0204/7]  106.68,149.86 90 top
R71  [0204/7]  109.22,149.86 90 top
R72  [0204/7]  111.76,149.86 90 top
R73  [0204/7]  134.62,7.62 0 top
R74  [0204/7]  134.62,10.16 0 top
R75  [0204/7]  134.62,15.24 0 top
R76  [0204/7]  134.62,35.56 0 top
R77  [0204/7]  134.62,38.1 0 top
R78  [0204/7]  134.62,43.18 0 top
R79  [0204/7]  149.86,38.1 90 top
R80  [0204/7]  152.4,38.1 90 top
R81  [0204/7]  154.94,38.1 90 top
R82  [0204/7]  165.1,38.1 90 top
R83  [0204/7]  167.64,38.1 90 top
R84  [0204/7]  170.18,38.1 90 top
R85  [0204/7]  193.04,7.62 0 top
R86  [0204/7]  193.04,10.16 0 top
R87  [0204/7]  193.04,15.24 0 top
R88  [0204/7]  193.04,35.56 0 top
R89  [0204/7]  193.04,38.1 0 top
R90  [0204/7]  193.04,43.18 0 top
R91  [0204/7]  208.28,38.1 90 top
R92  [0204/7]  210.82,38.1 90 top
R93  [0204/7]  213.36,38.1 90 top
R94  [0204/7]  223.52,38.1 90 top
R95  [0204/7]  226.06,38.1 90 top
R96  [0204/7]  228.6,38.1 90 top
R97  [0204/7]  134.62,63.5 0 top
R98  [0204/7]  134.62,66.04 0 top
R99  [0204/7]  134.62,71.12 0 top
R100  [0204/7]  134.62,91.44 0 top
R101  [0204/7]  134.62,93.98 0 top
R102  [0204/7]  134.62,99.06 0 top
R103  [0204/7]  149.86,93.98 90 top
R104  [0204/7]  152.4,93.98 90 top
R105  [0204/7]  154.94,93.98 90 top
R106  [0204/7]  165.1,93.98 90 top
R107  [0204/7]  167.64,93.98 90 top
R108  [0204/7]  170.18,93.98 90 top
R109  [0204/7]  193.04,63.5 0 top
R110  [0204/7]  193.04,66.04 0 top
R111  [0204/7]  193.04,71.12 0 top
R112  [0204/7]  193.04,91.44 0 top
R113  [0204/7]  193.04,93.98 0 top
R114  [0204/7]  193.04,99.06 0 top
R115  [0204/7]  208.28,93.98 90 top
R116  [0204/7]  210.82,93.98 90 top
R117  [0204/7]  213.36,93.98 90 top
R118  [0204/7]  223.52,93.98 90 top
R119  [0204/7]  226.06,93.98 90 top
R120  [0204/7]  228.6,93.98 90 top
R121  [0204/7]  134.62,119.38 0 top
R122  [0204/7]  134.62,121.92 0 top
R123  [0204/7]  134.62,127 0 top
R124  [0204/7]  134.62,147.32 0 top
R125  [0204/7]  134.62,149.86 0 top
R126  [0204/7]  134.62,154.94 0 top
R127  [0204/7]  149.86,149.86 90 top
R128  [0204/7]  152.4,149.86 90 top
R129  [0204/7]  154.94,149.86 90 top
R130  [0204/7]  165.1,149.86 90 top
R131  [0204/7]  167.64,149.86 90 top
R132  [0204/7]  170.18,149.86 90 top
R133  [0204/7]  193.04,119.38 0 top
R134  [0204/7]  193.04,121.92 0 top
R135  [0204/7]  193.04,127 0 top
R136  [0204/7]  193.04,147.32 0 top
R137  [0204/7]  193.04,149.86 0 top
R138  [0204/7]  193.04,154.94 0 top
R139  [0204/7]  208.28,149.86 90 top
R140  [0204/7]  210.82,149.86 90 top
R141  [0204/7]  213.36,149.86 90 top
R142  [0204/7]  223.52,149.86 90 top
R143  [0204/7]  226.06,149.86 90 top
R144  [0204/7]  228.6,149.86 90 top
R145  [0204/7]  38.1,190.5 0 top
R146  [0204/7]  38.1,187.96 0 top
R147  [0204/7]  38.1,185.42 0 top
R148  [0204/7]  38.1,175.26 0 top
R149  [0204/7]  38.1,172.72 0 top
R150  [0204/7]  38.1,170.18 0 top
R151  [0204/7]  96.52,190.5 0 top
R152  [0204/7]  96.52,187.96 0 top
R153  [0204/7]  96.52,185.42 0 top
R154  [0204/7]  96.52,175.26 0 top
R155  [0204/7]  96.52,172.72 0 top
R156  [0204/7]  96.52,170.18 0 top
R157  [0204/7]  154.94,190.5 0 top
R158  [0204/7]  154.94,187.96 0 top
R159  [0204/7]  154.94,185.42 0 top
R160  [0204/7]  154.94,175.26 0 top
R161  [0204/7]  154.94,172.72 0 top
R162  [0204/7]  154.94,170.18 0 top
R163  [0204/7]  213.36,190.5 0 top
R164  [0204/7]  213.36,187.96 0 top
R165  [0204/7]  213.36,185.42 0 top
R166  [0204/7]  213.36,175.26 0 top
R167  [0204/7]  213.36,172.72 0 top
R168  [0204/7]  213.36,170.18 0 top
R169  [0204/7]  238.76,38.1 90 top
R170  [0204/7]  241.3,38.1 90 top
R171  [0204/7]  243.84,38.1 90 top
R172  [0204/7]  254,38.1 90 top
R173  [0204/7]  256.54,38.1 90 top
R174  [0204/7]  259.08,38.1 90 top
R175  [0204/7]  238.76,93.98 90 top
R176  [0204/7]  241.3,93.98 90 top
R177  [0204/7]  243.84,93.98 90 top
R178  [0204/7]  254,93.98 90 top
R179  [0204/7]  256.54,93.98 90 top
R180  [0204/7]  259.08,93.98 90 top
R181  [0204/7]  238.76,149.86 90 top
R182  [0204/7]  241.3,149.86 90 top
R183  [0204/7]  243.84,149.86 90 top
R184  [0204/7]  254,149.86 90 top
R185  [0204/7]  256.54,149.86 90 top
R186  [0204/7]  259.08,149.86 90 top
SUP+  [1,6/0,8]  12.7,22.86 0 top
SUP+1  [1,6/0,8]  12.7,50.8 0 top
SUP+2  [1,6/0,8]  48.26,10.16 0 top
SUP+3  [1,6/0,8]  33.02,10.16 0 top
SUP+4  [1,6/0,8]  71.12,22.86 0 top
SUP+5  [1,6/0,8]  71.12,50.8 0 top
SUP+6  [1,6/0,8]  106.68,10.16 0 top
SUP+7  [1,6/0,8]  91.44,10.16 0 top
SUP+8  [1,6/0,8]  12.7,78.74 0 top
SUP+9  [1,6/0,8]  12.7,106.68 0 top
SUP+10  [1,6/0,8]  48.26,66.04 0 top
SUP+11  [1,6/0,8]  33.02,66.04 0 top
SUP+12  [1,6/0,8]  71.12,78.74 0 top
SUP+13  [1,6/0,8]  71.12,106.68 0 top
SUP+14  [1,6/0,8]  106.68,66.04 0 top
SUP+15  [1,6/0,8]  91.44,66.04 0 top
SUP+16  [1,6/0,8]  12.7,134.62 0 top
SUP+17  [1,6/0,8]  12.7,162.56 0 top
SUP+18  [1,6/0,8]  48.26,121.92 0 top
SUP+19  [1,6/0,8]  33.02,121.92 0 top
SUP+20  [1,6/0,8]  71.12,134.62 0 top
SUP+21  [1,6/0,8]  71.12,162.56 0 top
SUP+22  [1,6/0,8]  106.68,121.92 0 top
SUP+23  [1,6/0,8]  91.44,121.92 0 top
SUP+24  [1,6/0,8]  129.54,22.86 0 top
SUP+25  [1,6/0,8]  129.54,50.8 0 top
SUP+26  [1,6/0,8]  165.1,10.16 0 top
SUP+27  [1,6/0,8]  149.86,10.16 0 top
SUP+28  [1,6/0,8]  187.96,22.86 0 top
SUP+29  [1,6/0,8]  187.96,50.8 0 top
SUP+30  [1,6/0,8]  223.52,10.16 0 top
SUP+31  [1,6/0,8]  208.28,10.16 0 top
SUP+32  [1,6/0,8]  129.54,78.74 0 top
SUP+33  [1,6/0,8]  129.54,106.68 0 top
SUP+34  [1,6/0,8]  165.1,66.04 0 top
SUP+35  [1,6/0,8]  149.86,66.04 0 top
SUP+36  [1,6/0,8]  187.96,78.74 0 top
SUP+37  [1,6/0,8]  187.96,106.68 0 top
SUP+38  [1,6/0,8]  223.52,66.04 0 top
SUP+39  [1,6/0,8]  208.28,66.04 0 top
SUP+40  [1,6/0,8]  129.54,134.62 0 top
SUP+41  [1,6/0,8]  129.54,162.56 0 top
SUP+42  [1,6/0,8]  165.1,121.92 0 top
SUP+43  [1,6/0,8]  149.86,121.92 0 top
SUP+44  [1,6/0,8]  187.96,134.62 0 top
SUP+45  [1,6/0,8]  187.96,162.56 0 top
SUP+46  [1,6/0,8]  223.52,121.92 0 top
SUP+47  [1,6/0,8]  208.28,121.92 0 top
SUP+48  [1,6/0,8]  10.16,175.26 270 top
SUP+49  [1,6/0,8]  10.16,190.5 270 top
SUP+50  [1,6/0,8]  68.58,175.26 270 top
SUP+51  [1,6/0,8]  68.58,190.5 270 top
SUP+52  [1,6/0,8]  127,175.26 270 top
SUP+53  [1,6/0,8]  127,190.5 270 top
SUP+54  [1,6/0,8]  185.42,175.26 270 top
SUP+55  [1,6/0,8]  185.42,190.5 270 top
SUP+56  [1,6/0,8]  254,10.16 0 top
SUP+57  [1,6/0,8]  238.76,10.16 0 top
SUP+58  [1,6/0,8]  254,66.04 0 top
SUP+59  [1,6/0,8]  238.76,66.04 0 top
SUP+60  [1,6/0,8]  254,121.92 0 top
SUP+61  [1,6/0,8]  238.76,121.92 0 top
SUP-  [1,6/0,8]  12.7,2.54 0 top
SUP-1  [1,6/0,8]  12.7,30.48 0 top
SUP-2  [1,6/0,8]  38.1,10.16 0 top
SUP-3  [1,6/0,8]  53.34,10.16 0 top
SUP-4  [1,6/0,8]  71.12,2.54 0 top
SUP-5  [1,6/0,8]  71.12,30.48 0 top
SUP-6  [1,6/0,8]  96.52,10.16 0 top
SUP-7  [1,6/0,8]  111.76,10.16 0 top
SUP-8  [1,6/0,8]  12.7,58.42 0 top
SUP-9  [1,6/0,8]  12.7,86.36 0 top
SUP-10  [1,6/0,8]  38.1,66.04 0 top
SUP-11  [1,6/0,8]  53.34,66.04 0 top
SUP-12  [1,6/0,8]  71.12,58.42 0 top
SUP-13  [1,6/0,8]  71.12,86.36 0 top
SUP-14  [1,6/0,8]  96.52,66.04 0 top
SUP-15  [1,6/0,8]  111.76,66.04 0 top
SUP-16  [1,6/0,8]  12.7,114.3 0 top
SUP-17  [1,6/0,8]  12.7,142.24 0 top
SUP-18  [1,6/0,8]  38.1,121.92 0 top
SUP-19  [1,6/0,8]  53.34,121.92 0 top
SUP-20  [1,6/0,8]  71.12,114.3 0 top
SUP-21  [1,6/0,8]  71.12,142.24 0 top
SUP-22  [1,6/0,8]  96.52,121.92 0 top
SUP-23  [1,6/0,8]  111.76,121.92 0 top
SUP-24  [1,6/0,8]  129.54,2.54 0 top
SUP-25  [1,6/0,8]  129.54,30.48 0 top
SUP-26  [1,6/0,8]  154.94,10.16 0 top
SUP-27  [1,6/0,8]  170.18,10.16 0 top
SUP-28  [1,6/0,8]  187.96,2.54 0 top
SUP-29  [1,6/0,8]  187.96,30.48 0 top
SUP-30  [1,6/0,8]  213.36,10.16 0 top
SUP-31  [1,6/0,8]  228.6,10.16 0 top
SUP-32  [1,6/0,8]  129.54,58.42 0 top
SUP-33  [1,6/0,8]  129.54,86.36 0 top
SUP-34  [1,6/0,8]  154.94,66.04 0 top
SUP-35  [1,6/0,8]  170.18,66.04 0 top
SUP-36  [1,6/0,8]  187.96,58.42 0 top
SUP-37  [1,6/0,8]  187.96,86.36 0 top
SUP-38  [1,6/0,8]  213.36,66.04 0 top
SUP-39  [1,6/0,8]  228.6,66.04 0 top
SUP-40  [1,6/0,8]  129.54,114.3 0 top
SUP-41  [1,6/0,8]  129.54,142.24 0 top
SUP-42  [1,6/0,8]  154.94,121.92 0 top
SUP-43  [1,6/0,8]  170.18,121.92 0 top
SUP-44  [1,6/0,8]  187.96,114.3 0 top
SUP-45  [1,6/0,8]  187.96,142.24 0 top
SUP-46  [1,6/0,8]  213.36,121.92 0 top
SUP-47  [1,6/0,8]  228.6,121.92 0 top
SUP-48  [1,6/0,8]  10.16,185.42 270 top
SUP-49  [1,6/0,8]  10.16,170.18 270 top
SUP-50  [1,6/0,8]  68.58,185.42 270 top
SUP-51  [1,6/0,8]  68.58,170.18 270 top
SUP-52  [1,6/0,8]  127,185.42 270 top
SUP-53  [1,6/0,8]  127,170.18 270 top
SUP-54  [1,6/0,8]  185.42,185.42 270 top
SUP-55  [1,6/0,8]  185.42,170.18 270 top
SUP-56  [1,6/0,8]  243.84,10.16 0 top
SUP-57  [1,6/0,8]  259.08,10.16 0 top
SUP-58  [1,6/0,8]  243.84,66.04 0 top
SUP-59  [1,6/0,8]  259.08,66.04 0 top
SUP-60  [1,6/0,8]  243.84,121.92 0 top
SUP-61  [1,6/0,8]  259.08,121.92 0 top

## Library data of the parts
BTN1-BTN62 SUP+ SUP+1-SUP+61 SUP- SUP-1-SUP-61 = wirepad
C1-C124 R1-R186 = rcl
D1-D62 = diode
IC1 IC3 IC5 IC7 IC9 IC11 IC13 IC15 IC17 IC19 IC21 IC23 IC25 IC27 IC29 IC31 IC33 IC35 IC37 IC39 IC41 IC43 IC45 IC47 IC49 IC51 IC53 IC55 IC57 IC59 IC61 IC63 IC65 IC67 IC69 IC71 IC73 IC75 IC77 IC79 IC81 IC83 IC85 IC87 IC89 IC91 IC93 IC95 IC97 IC99 IC101 IC103 IC105 IC107 IC109 IC111 IC113 IC115 IC117 IC119 IC121 IC123 = microchip
IC2 IC4 IC6 IC8 IC10 IC12 IC14 IC16 IC18 IC20 IC22 IC24 IC26 IC28 IC30 IC32 IC34 IC36 IC38 IC40 IC42 IC44 IC46 IC48 IC50 IC52 IC54 IC56 IC58 IC60 IC62 IC64 IC66 IC68 IC70 IC72 IC74 IC76 IC78 IC80 IC82 IC84 IC86 IC88 IC90 IC92 IC94 IC96 IC98 IC100 IC102 IC104 IC106 IC108 IC110 IC112 IC114 IC116 IC118 IC120 IC122 IC124 = linear
LED1-LED186 = led